# Altium PCB RS485_GPIO.PcbDoc (part 3 of 3)
Units mm, origin at the board's own origin, x right, y up, seen from the top; angles counter-clockwise.
Board outline 152.4 x 101.6 mm, 2 copper layers (Top Layer, Bottom Layer); 132 components, 100 nets, 460 pads, 0 vias.
Unrouted connection lines stored in the file: 308.
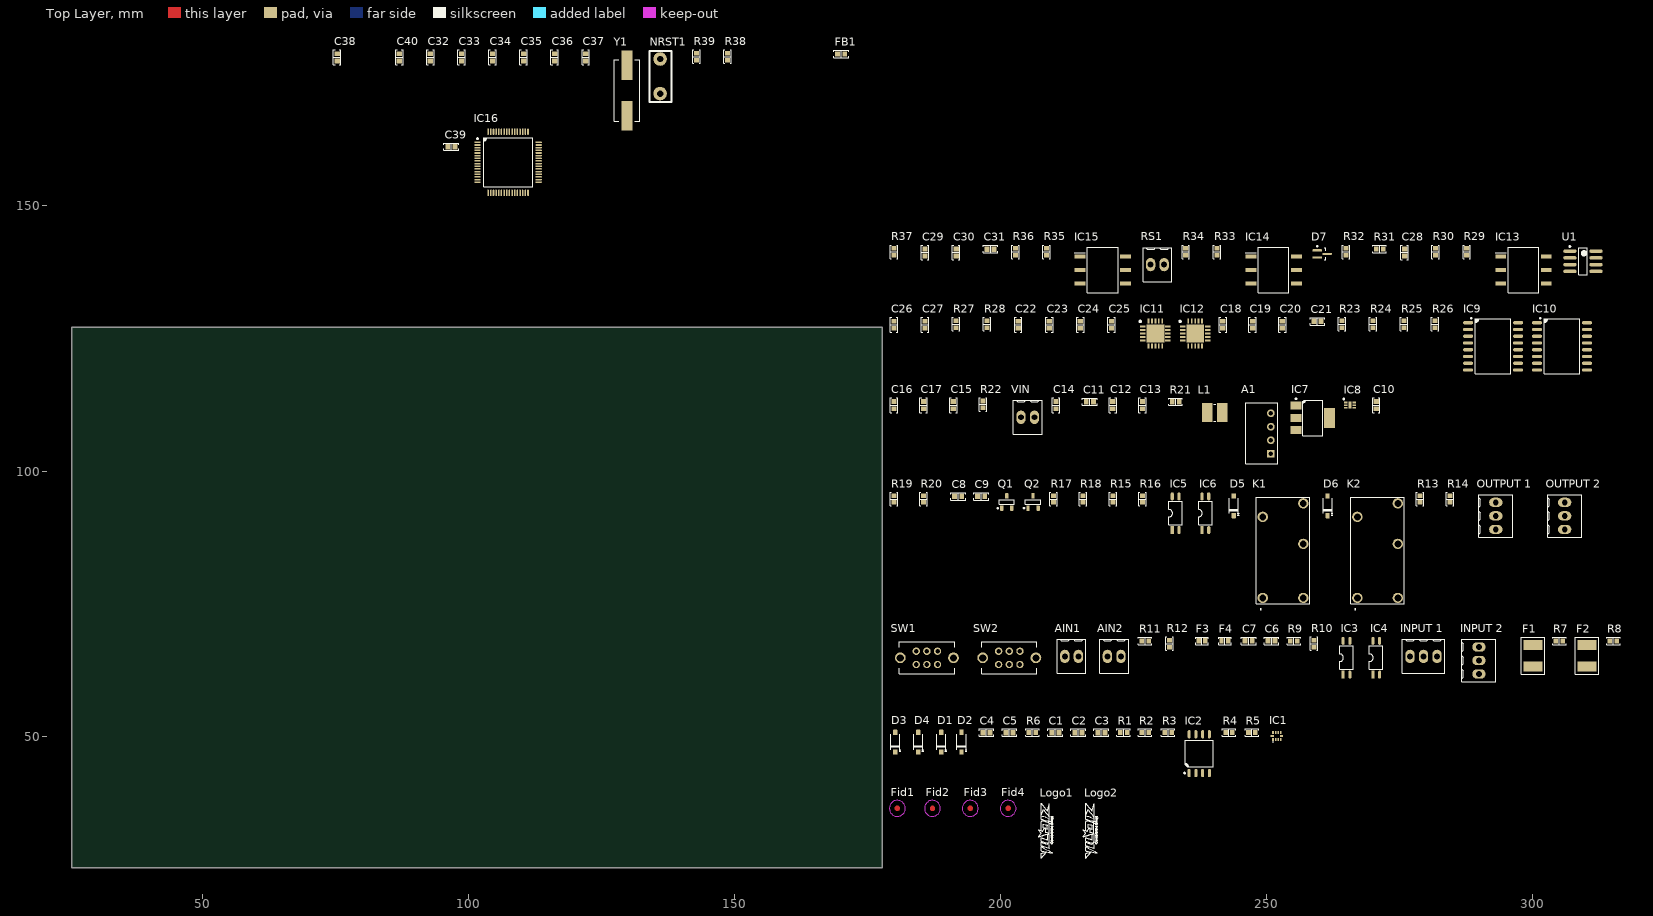
[diagram p0: Top Layer view]

## Nets (pads, with @x,y where several pads share a name; then routed paths per layer and width w, separated by ;. In a path a pad name is that pad's centre, name@x,y a point inside that pad or via, vN(x,y) a via of type N, cw(c..) or ccw(c..) an arc to the next point about the centre after c; other vN are vias at no path point) (continued)
PT100_2P: C27.2 IC12.5 IC12.7 SW2.4
RELAY_COM1: "OUTPUT 1.2" K1.4
RELAY_COM2: "OUTPUT 2.2" K2.4
RELAY_NC1: "OUTPUT 1.1" K1.2
RELAY_NC2: "OUTPUT 2.1" K2.2
RELAY_NO1: "OUTPUT 1.3" K1.3
RELAY_NO2: "OUTPUT 2.3" K2.3
RS485B_N: D7.1 R31.2 R37.2 RS1.1
RS485B_P: D7.2 R32.2 R37.1 RS1.2
SCK1: IC9.15 IC11.12
SCK2: IC10.15 IC12.12
SCL: IC1.10 IC2.6 R5.2
SDA: IC1.9 IC2.7 R4.2
VDDA: C36.2 C37.2 FB1.1 IC16.13
VRS485: C28.2 C29.2 C30.2 IC14.6 IC15.6 R33.1 R35.1 U1.8
pads on no net: D1.0 D2.0 D3.0 D4.0 D5.0 D6.0 IC1.2 IC1.6 IC1.7 IC11.17 IC12.17 IC13.3 IC14.3 IC15.3 IC16.2 IC16.3 IC16.4 IC16.8 IC16.9 IC16.10 IC16.11 IC16.14 IC16.18 IC16.28 IC16.38 IC16.39 IC16.40 IC16.41 IC16.42 IC16.43 IC16.44 IC16.45 IC16.46 IC16.47 IC16.48 IC16.49 IC16.50 IC16.51 IC16.52 IC16.53 IC16.54 IC16.55 IC16.56 IC16.57 IC16.58 IC16.59 IC16.61 IC16.62 SW1.7 SW1.8 SW2.7 SW2.8